# Altium PCB 电眼主板.PcbDoc (part 2 of 5)
Units mm, origin at the board's own origin, x right, y up, seen from the top; angles counter-clockwise.
Board outline 180 x 100 mm, 2 copper layers (Top Layer, Bottom Layer); 210 components, 262 nets, 810 pads, 212 vias.
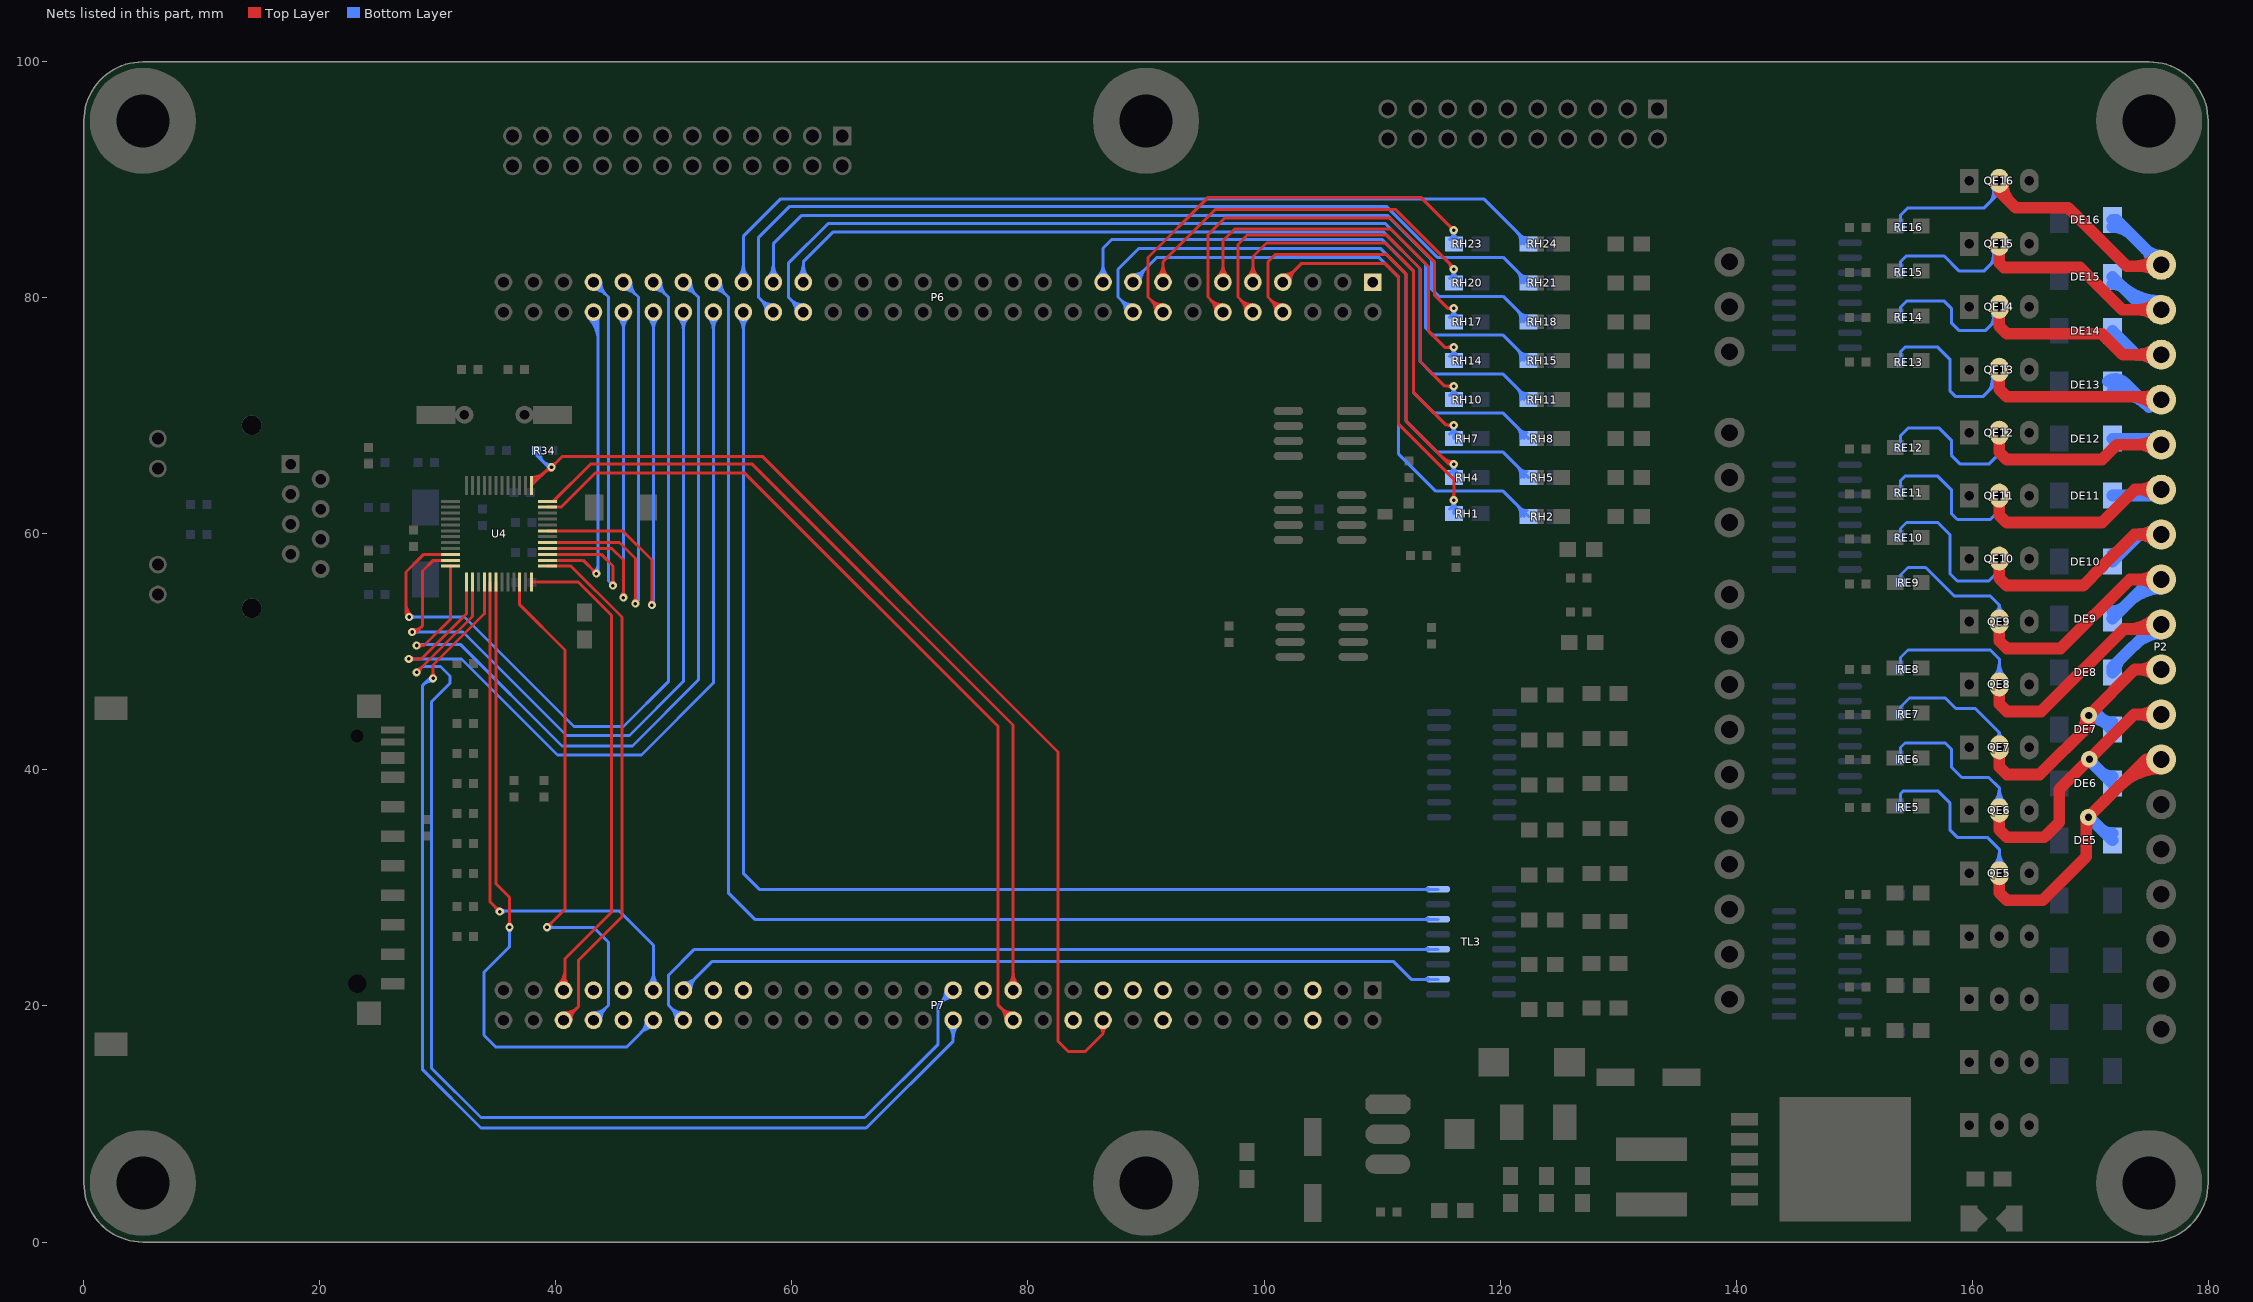
[diagram p2: the nets of this part, all layers, seen from the top]

## Via types
v1: diameter 0.7, hole 0.3, Top Layer to Bottom Layer, 163 vias
v2: diameter 1.4, hole 0.6, Top Layer to Bottom Layer, 49 vias

## Nets (pads, with @x,y where several pads share a name; then routed paths per layer and width w, separated by ;. In a path a pad name is that pad's centre, name@x,y a point inside that pad or via, vN(x,y) a via of type N, cw(c..) or ccw(c..) an arc to the next point about the centre after c; other vN are vias at no path point) (continued)
EXT_OUT_CH4: DE5.2 P2.12 QE5.2 RE5.1 | length 53.4
  Top Layer w1: QE5.2@162.306,31.242 162.306,29.591 162.941,28.956 165.989,28.956 169.672,32.639 169.672,35.814 174.752,40.894 P2.12@176.022,40.894 ; 169.672,35.075 cw(c170.772,35.075) v2@169.994,35.853 ; 172.54,38.682 cw(c176.022,35.199) P2.12@176.022,40.124 ; 174.247,40.389 cw(c176.022,38.613) P2.12@176.022,41.124
  Bottom Layer w0.254: RE5.1@153.744,37.01 ccw(c153.311,37.443) 153.924,37.443 ccw(c154.537,37.443) RE5.1@154.104,37.01 ; RE5.1@153.924,36.83 153.924,37.973 154.178,38.227 157.099,38.227 158.115,37.211 158.115,34.925 158.75,34.29 161.29,34.29 162.306,33.274 QE5.2@162.306,31.242 ; QE5.2@161.839,31.938 ccw(c160.712,33.065) 162.306,33.065 ccw(c163.9,33.065) QE5.2@162.773,31.938 ; QE5.2@162.019,31.758 ccw(c161.325,32.452) 162.306,32.452 ccw(c163.287,32.452) QE5.2@162.593,31.758
  Bottom Layer w1: v2(169.853,35.995) 169.853,36.014 169.799,36.068 169.854,36.068 DE5.2@171.886,34.036 ; 170.862,35.06 ccw(c171.886,36.085) DE5.2@171.886,34.636
EXT_OUT_CH5: DE6.2 P2.11 QE6.2 RE6.1 | length 47.4
  Top Layer w1: QE6.2@162.306,36.576 162.306,34.925 162.941,34.29 166.116,34.29 167.386,35.56 167.386,38.354 172.148,43.116 173.736,44.704 P2.11@176.022,44.704 ; P2.11@175.478,44.16 ccw(c174.163,42.845) 174.163,44.704 ccw(c174.163,46.563) P2.11@175.478,45.248
  Bottom Layer w0.254: RE6.1@153.744,41.074 ccw(c153.311,41.507) 153.924,41.507 ccw(c154.537,41.507) RE6.1@154.104,41.074 ; RE6.1@153.924,40.894 153.924,41.91 154.305,42.291 157.734,42.291 158.242,41.783 158.242,40.259 159.131,39.37 161.417,39.37 162.306,38.481 QE6.2@162.306,36.576 ; QE6.2@161.839,37.272 ccw(c160.712,38.399) 162.306,38.399 ccw(c163.9,38.399) QE6.2@162.773,37.272 ; QE6.2@162.019,37.092 ccw(c161.325,37.786) 162.306,37.786 ccw(c163.287,37.786) QE6.2@162.593,37.092
  Bottom Layer w1: v2(169.936,40.904) 169.936,40.812 DE6.2@171.886,38.862 ; 170.862,39.886 ccw(c171.886,40.911) DE6.2@171.886,39.462
EXT_OUT_CH6: DE7.2 P2.10 QE7.2 RE7.1 | length 47.6
  Top Layer w1: QE7.2@162.306,41.91 162.306,40.259 162.941,39.624 165.735,39.624 169.907,43.796 v2@169.907,44.639 ; 168.946,42.835 ccw(c167.166,44.616) v2@169.684,44.616 ; v2(169.884,44.616) v2@169.907,44.639 ; P2.10@175.478,47.97 ccw(c174.163,46.655) 174.163,48.514 ccw(c174.163,50.373) P2.10@175.478,49.058 ; P2.10@176.022,48.514 173.782,48.514 v2@169.907,44.639
  Bottom Layer w0.254: RE7.1@153.744,44.884 ccw(c153.311,45.317) 153.924,45.317 ccw(c154.537,45.317) RE7.1@154.104,44.884 ; RE7.1@153.924,44.704 153.924,45.339 154.686,46.101 157.734,46.101 158.623,45.212 160.274,45.212 162.306,43.18 ; QE7.2@162.024,42.736 ccw(c161.815,43.18) 162.306,43.18 ; QE7.2@162.306,41.91 162.306,43.18 ; QE7.2@162.588,42.736 cw(c162.797,43.18) 162.306,43.18
  Bottom Layer w1: v2@169.884,44.416 cw(c169.884,41.951) DE7.2@171.626,43.694 ; v2@169.961,44.431 cw(c170.37,43.46) DE7.2@171.115,44.205 ; 170.862,44.458 ccw(c171.886,45.483) DE7.2@171.886,44.034 ; DE7.2@171.623,43.589 ccw(c169.884,42.628) v2(169.884,44.616) 170.704,44.616 DE7.2@171.886,43.434
EXT_OUT_CH7: DE8.2 P2.9 QE8.2 RE8.1 | length 47.6
  Top Layer w1: QE8.2@162.306,47.244 162.306,45.593 162.941,44.958 165.862,44.958 172.847,51.943 175.641,51.943 P2.9@176.022,52.324 ; 173.243,51.943 ccw(c173.243,55.103) P2.9@175.478,52.868
  Bottom Layer w0.254: RE8.1@153.744,48.694 ccw(c153.311,49.127) 153.924,49.127 ccw(c154.537,49.127) RE8.1@154.104,48.694 ; RE8.1@153.924,48.514 153.924,49.53 154.559,50.165 161.544,50.165 162.306,49.403 QE8.2@162.306,47.244 ; QE8.2@161.839,47.94 ccw(c160.712,49.067) 162.306,49.067 ccw(c163.9,49.067) QE8.2@162.773,47.94 ; QE8.2@162.019,47.76 ccw(c161.325,48.454) 162.306,48.454 ccw(c163.287,48.454) QE8.2@162.593,47.76
  Bottom Layer w1: DE8.2@171.886,48.26 171.886,48.696 175.514,52.324 P2.9@176.022,52.324 ; DE8.2@172.186,48.56 cw(c173.239,48.56) DE8.2@172.494,49.304 ; 173.84,50.65 cw(c176.022,48.469) P2.9@176.022,51.554
EXT_OUT_CH8: DE9.2 P2.8 QE9.2 RE9.1 | length 45.1
  Top Layer w1: QE9.2@162.306,52.578 162.306,50.927 162.941,50.292 167.513,50.292 173.355,56.134 P2.8@176.022,56.134 ; P2.8@175.478,55.59 ccw(c174.163,54.275) 174.163,56.134 ccw(c174.163,57.993) P2.8@175.478,56.678
  Bottom Layer w0.254: RE9.1@153.744,56.06 ccw(c153.311,56.493) 153.924,56.493 ccw(c154.537,56.493) RE9.1@154.104,56.06 ; RE9.1@153.924,55.88 153.924,56.515 154.559,57.15 156.068,57.15 158.481,54.737 161.544,54.737 162.306,53.975 ; QE9.2@161.965,53.372 ccw(c161.603,53.975) 162.306,53.975 ; QE9.2@162.306,52.578 162.306,53.975 ; QE9.2@162.647,53.372 cw(c163.009,53.975) 162.306,53.975
  Bottom Layer w1: DE9.2@171.886,52.832 175.188,56.134 P2.8@176.022,56.134 ; DE9.2@171.886,53.432 ccw(c171.886,54.881) 172.91,53.856 ; 173.284,54.23 cw(c176.022,51.492) P2.8@176.022,55.364
EXT_OUT_CH9: DE10.2 P2.7 QE10.2 RE10.1 | length 47.9
  Top Layer w1: QE10.2@162.306,57.912 162.306,56.261 162.941,55.626 169.418,55.626 170.998,57.206 173.736,59.944 P2.7@176.022,59.944 ; P2.7@175.478,59.4 ccw(c174.163,58.085) 174.163,59.944 ccw(c174.163,61.803) P2.7@175.478,60.488
  Bottom Layer w0.254: RE10.1@153.744,59.87 ccw(c153.311,60.303) 153.924,60.303 ccw(c154.537,60.303) RE10.1@154.104,59.87 ; RE10.1@153.924,59.69 153.924,60.452 154.432,60.96 157.099,60.96 158.115,59.944 158.115,56.642 158.75,56.007 161.417,56.007 162.306,56.896 QE10.2@162.306,57.912 ; 161.811,56.401 ccw(c161.388,56.823) QE10.2@161.824,57.232 ; 161.996,56.586 ccw(c161.58,57.003) QE10.2@162.009,57.405 ; 162.182,56.772 ccw(c161.771,57.182) QE10.2@162.195,57.579
  Bottom Layer w1: DE10.2@171.886,57.658 174.172,59.944 ; DE10.2@171.886,58.258 ccw(c171.886,59.707) 172.91,58.682 ; P2.7@175.476,59.401 ccw(c174.172,58.107) 174.172,59.944 ; P2.7@175.476,60.487 cw(c174.172,61.781) 174.172,59.944 ; P2.7@176.022,59.944 174.172,59.944
EXT_OUT_CH10: DE11.2 P2.6 QE11.2 RE11.1 | length 42.8
  Top Layer w1: QE11.2@162.306,63.246 162.306,61.595 162.941,60.96 170.998,60.96 173.792,63.754 P2.6@176.022,63.754 ; P2.6@175.478,63.21 ccw(c174.163,61.895) 174.163,63.754 ccw(c174.163,65.613) P2.6@175.478,64.298
  Bottom Layer w0.254: RE11.1@153.744,63.68 ccw(c153.311,64.113) 153.924,64.113 ccw(c154.537,64.113) RE11.1@154.104,63.68 ; RE11.1@153.924,63.5 153.924,64.516 154.305,64.897 157.099,64.897 158.242,63.754 158.242,61.722 158.75,61.214 161.544,61.214 162.306,61.976 ; QE11.2@162.024,62.42 cw(c161.815,61.976) 162.306,61.976 ; QE11.2@162.306,63.246 162.306,61.976 ; QE11.2@162.588,62.42 ccw(c162.797,61.976) 162.306,61.976
  Bottom Layer w1: DE11.2@171.886,63.246 175.514,63.246 P2.6@176.022,63.754 ; 172.937,63.246 ccw(c172.937,66.839) P2.6@175.478,64.298
EXT_OUT_CH11: DE12.2 P2.5 QE12.2 RE12.1 | length 44.9
  Top Layer w1: QE12.2@162.306,68.58 162.306,66.929 162.941,66.294 170.998,66.294 172.268,67.564 P2.5@176.022,67.564 ; P2.5@175.478,67.02 ccw(c174.163,65.705) 174.163,67.564 ccw(c174.163,69.423) P2.5@175.478,68.108
  Bottom Layer w0.254: RE12.1@153.744,67.49 ccw(c153.311,67.923) 153.924,67.923 ccw(c154.537,67.923) RE12.1@154.104,67.49 ; RE12.1@153.924,67.31 153.924,68.326 154.559,68.961 157.226,68.961 158.242,67.945 158.242,66.675 159.004,65.913 161.417,65.913 162.306,66.802 ; QE12.2@161.849,67.875 cw(c160.819,66.802) 162.306,66.802 ; QE12.2@162.025,68.058 cw(c161.391,67.398) 162.306,67.398 cw(c163.221,67.398) QE12.2@162.587,68.058 ; QE12.2@162.306,68.58 162.306,66.802 ; QE12.2@162.763,67.875 ccw(c163.793,66.802) 162.306,66.802
  Bottom Layer w1: DE12.2@171.886,68.072 175.514,68.072 P2.5@176.022,67.564 ; 172.937,68.072 cw(c172.937,64.479) P2.5@175.478,67.02
EXT_OUT_CH12: DE13.2 P2.4 QE13.2 RE13.1 | length 54.4
  Top Layer w1: QE13.2@162.306,73.914 162.306,72.263 162.941,71.628 175.768,71.628 P2.4@176.022,71.374 ; 173.55,71.628 cw(c173.55,68.902) P2.4@175.478,70.83 ; 174.776,71.628 ccw(c174.776,72.62) P2.4@175.478,71.918
  Bottom Layer w0.254: RE13.1@153.77,74.729 ccw(c153.336,75.162) 153.949,75.162 ccw(c154.562,75.162) RE13.1@154.129,74.729 ; RE13.1@153.949,74.549 153.949,75.463 154.305,75.819 157.099,75.819 158.115,74.803 158.115,72.136 158.623,71.628 160.909,71.628 162.306,73.025 QE13.2@162.306,73.914 ; 161.239,71.958 ccw(c160.084,73.114) QE13.2@161.666,73.521 ; 161.554,72.273 ccw(c160.584,73.243) QE13.2@161.912,73.584 ; 161.869,72.588 ccw(c161.085,73.371) QE13.2@162.158,73.647 ; 162.183,72.902 ccw(c161.586,73.5) QE13.2@162.404,73.711
  Bottom Layer w1: DE13.2@171.513,72.936 cw(c172.14,71.94) 172.972,72.773 ; DE13.2@171.886,72.044 cw(c171.886,67.662) P2.4@174.984,70.761 ; DE13.2@171.886,72.644 173.101,72.644 174.498,71.247 ; DE13.2@171.886,73.044 cw(c171.886,71.076) 173.277,72.468 ; DE13.2@172.046,72.09 cw(c172.825,70.853) 173.858,71.887 ; P2.4@175.349,71.748 cw(c174.498,72.22) 174.498,71.247 ; P2.4@175.47,70.837 ccw(c174.498,69.89) 174.498,71.247 ; P2.4@176.022,71.374 175.895,71.247 174.498,71.247
EXT_OUT_CH13: DE14.2 P2.3 QE14.2 RE14.1 | length 45.2
  Top Layer w1: QE14.2@162.306,79.248 162.306,77.597 162.941,76.962 170.998,76.962 172.776,75.184 P2.3@176.022,75.184 ; P2.3@175.478,74.64 ccw(c174.163,73.325) 174.163,75.184 ccw(c174.163,77.043) P2.3@175.478,75.728
  Bottom Layer w0.254: RE14.1@153.77,78.539 ccw(c153.336,78.972) 153.949,78.972 ccw(c154.562,78.972) RE14.1@154.129,78.539 ; RE14.1@153.949,78.359 153.949,79.223 154.482,79.756 157.607,79.756 158.242,79.121 158.242,77.883 158.877,77.248 161.163,77.248 162.306,78.391 QE14.2@162.306,79.248 ; 161.477,77.562 ccw(c160.718,78.322) QE14.2@161.701,78.754 ; 161.74,77.825 ccw(c161.083,78.482) QE14.2@161.934,78.856 ; 162.003,78.088 ccw(c161.448,78.643) QE14.2@162.166,78.958
  Bottom Layer w1: DE14.2@171.886,76.616 cw(c171.886,75.167) 172.91,76.192 ; DE14.2@171.886,77.216 173.918,75.184 P2.3@176.022,75.184 ; P2.3@175.478,74.64 ccw(c174.163,73.325) 174.163,75.184 ccw(c174.163,77.043) P2.3@175.478,75.728
EXT_OUT_CH14: DE15.2 P2.2 QE15.2 RE15.1 | length 49.7
  Top Layer w1: QE15.2@162.306,84.582 162.306,82.963 162.687,82.582 169.132,82.582 172.72,78.994 P2.2@176.022,78.994 ; P2.2@175.478,78.45 ccw(c174.163,77.135) 174.163,78.994 ccw(c174.163,80.853) P2.2@175.478,79.538
  Bottom Layer w0.254: RE15.1@153.77,82.349 ccw(c153.336,82.782) 153.949,82.782 ccw(c154.562,82.782) RE15.1@154.129,82.349 ; RE15.1@153.949,82.169 153.949,83.083 154.409,83.543 157.63,83.543 158.877,82.296 161.036,82.296 162.306,83.566 QE15.2@162.306,84.582 ; 161.43,82.69 ccw(c160.529,83.59) QE15.2@161.699,84.093 ; 161.695,82.955 ccw(c160.9,83.749) QE15.2@161.933,84.193 ; 161.96,83.22 ccw(c161.271,83.909) QE15.2@162.166,84.293 ; 162.225,83.485 ccw(c161.642,84.068) QE15.2@162.399,84.394
  Bottom Layer w1: DE15.2@171.886,81.188 cw(c171.886,79.739) 172.91,80.764 ; DE15.2@171.886,81.788 174.68,78.994 P2.2@176.022,78.994 ; DE15.2@172.557,81.117 ccw(c175.831,84.391) P2.2@175.995,79.764 ; 174.182,79.492 ccw(c175.942,81.251) P2.2@176.03,78.764
EXT_OUT_CH15: DE16.2 P2.1 QE16.2 RE16.1 | length 49.5
  Top Layer w1: QE16.2@162.306,89.916 162.306,89.027 163.703,87.63 168.148,87.63 173.101,82.677 175.895,82.677 P2.1@176.022,82.804 ; QE16.2@162.593,89.687 ccw(c164.882,89.687) 163.264,88.069 ; 173.856,82.677 ccw(c173.856,84.97) P2.1@175.478,83.348 ; 174.47,82.677 cw(c174.47,81.252) P2.1@175.478,82.26
  Bottom Layer w0.254: RE16.1@153.77,86.159 ccw(c153.336,86.592) 153.949,86.592 ccw(c154.562,86.592) RE16.1@154.129,86.159 ; RE16.1@153.949,85.979 153.949,87.02 154.559,87.63 161.036,87.63 162.306,88.9 QE16.2@162.306,89.916 ; 161.43,88.024 ccw(c160.529,88.924) QE16.2@161.699,89.427 ; 161.695,88.289 ccw(c160.9,89.083) QE16.2@161.933,89.527 ; 161.96,88.554 ccw(c161.271,89.243) QE16.2@162.166,89.627 ; 162.225,88.819 ccw(c161.642,89.402) QE16.2@162.399,89.728
  Bottom Layer w1: DE16.2@171.886,86.014 cw(c171.886,83.778) 173.467,85.359 ; DE16.2@171.886,86.614 172.212,86.614 P2.1@176.022,82.804 ; P2.1@175.252,82.804 ccw(c173.393,82.804) 174.708,84.118 ccw(c176.022,85.433) P2.1@176.022,83.574
FSMC_A0: P6.7 RH1.2 | length 40.1
  Top Layer w0.254: P6.7@101.6,81.336 103.195,82.931 110.236,82.931 111.379,81.788 111.379,69.341 116.078,64.642 v1(116.078,62.863) ; P6.7@101.6,81.705 ccw(c101.6,82.596) 102.23,81.966 ccw(c102.86,81.336) P6.7@101.969,81.336 ; P6.7@101.6,81.959 ccw(c101.6,83.463) 102.664,82.4 ccw(c103.727,81.336) P6.7@102.223,81.336 ; v1@115.92,63.021 ccw(c115.54,63.402) 116.078,63.402 ccw(c116.616,63.402) v1@116.236,63.021
  Bottom Layer w0.254: RH1.2@115.738,62.097 ccw(c115.046,62.863) v1(116.078,62.863) ; v1@115.92,62.706 cw(c115.54,62.325) 116.078,62.325 cw(c116.616,62.325) v1@116.236,62.706 ; RH1.2@116.078,61.72 v1(116.078,62.863) ; RH1.2@116.418,62.097 cw(c117.11,62.863) v1(116.078,62.863)
FSMC_A1: P6.8 RH4.2 | length 44.7
  Top Layer w0.254: P6.8@100.977,78.796 ccw(c99.473,78.796) 100.536,79.86 ccw(c101.6,80.923) P6.8@101.6,79.419 ; P6.8@101.231,78.796 ccw(c100.34,78.796) 100.97,79.426 ccw(c101.6,80.056) P6.8@101.6,79.165 ; P6.8@101.6,78.796 100.33,80.066 100.33,83.058 100.965,83.693 110.363,83.693 112.014,82.042 112.014,69.596 115.699,65.911 v1(116.078,65.911) ; 115.05,66.56 ccw(c116.078,67.589) v1@116.078,66.134 ; 115.483,66.127 ccw(c116.078,66.721) v1@116.078,65.88
  Bottom Layer w0.254: RH4.2@115.738,65.145 ccw(c115.046,65.911) v1(116.078,65.911) ; v1@115.92,65.754 cw(c115.54,65.373) 116.078,65.373 cw(c116.616,65.373) v1@116.236,65.754 ; RH4.2@116.078,64.768 v1(116.078,65.911) ; RH4.2@116.418,65.145 cw(c117.11,65.911) v1(116.078,65.911)
FSMC_A2: P6.9 RH7.2 | length 40.4
  Top Layer w0.254: P6.9@98.619,81.777 ccw(c97.556,82.84) 99.06,82.84 ccw(c100.564,82.84) P6.9@99.501,81.777 ; P6.9@98.799,81.597 ccw(c98.169,82.227) 99.06,82.227 ccw(c99.951,82.227) P6.9@99.321,81.597 ; P6.9@99.06,81.336 99.06,83.512 100.203,84.655 110.29,84.655 112.649,82.296 112.649,72.009 115.445,69.213 v1(116.078,69.213) ; v1@115.92,69.056 ccw(c115.54,68.675) 115.54,69.213 ccw(c115.54,69.752) v1@115.92,69.371
  Bottom Layer w0.254: RH7.2@115.738,68.447 ccw(c115.046,69.213) v1(116.078,69.213) ; v1@115.92,69.056 cw(c115.54,68.675) 116.078,68.675 cw(c116.616,68.675) v1@116.236,69.056 ; RH7.2@116.078,68.07 v1(116.078,69.213) ; RH7.2@116.418,68.447 cw(c117.11,69.213) v1(116.078,69.213)
FSMC_A3: P6.10 RH10.2 | length 43.1
  Top Layer w0.254: P6.10@98.437,78.796 ccw(c96.933,78.796) 97.996,79.86 ccw(c99.06,80.923) P6.10@99.06,79.419 ; P6.10@98.691,78.796 ccw(c97.8,78.796) 98.43,79.426 ccw(c99.06,80.056) P6.10@99.06,79.165 ; P6.10@99.06,78.796 97.79,80.066 97.79,84.528 98.606,85.344 110.363,85.344 113.259,82.448 113.259,74.574 115.318,72.515 v1(116.078,72.515) ; v1@115.92,72.358 ccw(c115.54,71.977) 115.54,72.515 ccw(c115.54,73.054) v1@115.92,72.673
  Bottom Layer w0.254: RH10.2@115.738,71.749 ccw(c115.046,72.515) v1(116.078,72.515) ; v1@115.92,72.358 cw(c115.54,71.977) 116.078,71.977 cw(c116.616,71.977) v1@116.236,72.358 ; RH10.2@116.078,71.372 v1(116.078,72.515) ; RH10.2@116.418,71.749 cw(c117.11,72.515) v1(116.078,72.515)
FSMC_A4: P6.11 RH14.2 | length 39.1
  Top Layer w0.254: P6.11@96.079,81.777 ccw(c95.016,82.84) 96.52,82.84 ccw(c98.024,82.84) P6.11@96.961,81.777 ; P6.11@96.259,81.597 ccw(c95.629,82.227) 96.52,82.227 ccw(c97.411,82.227) P6.11@96.781,81.597 ; P6.11@96.52,81.336 96.52,84.836 97.536,85.852 110.725,85.852 113.919,82.658 113.919,77.216 115.318,75.817 v1(116.078,75.817) ; v1@115.92,75.66 ccw(c115.54,75.279) 115.54,75.817 ccw(c115.54,76.356) v1@115.92,75.975
  Bottom Layer w0.254: RH14.2@115.738,75.051 ccw(c115.046,75.817) v1(116.078,75.817) ; v1@115.92,75.66 cw(c115.54,75.279) 116.078,75.279 cw(c116.616,75.279) v1@116.236,75.66 ; RH14.2@116.078,74.674 v1(116.078,75.817) ; RH14.2@116.418,75.051 cw(c117.11,75.817) v1(116.078,75.817)
FSMC_A5: P6.12 RH17.2 | length 41.5
  Top Layer w0.254: P6.12@95.897,78.796 ccw(c94.393,78.796) 95.456,79.86 ccw(c96.52,80.923) P6.12@96.52,79.419 ; P6.12@96.151,78.796 ccw(c95.26,78.796) 95.89,79.426 ccw(c96.52,80.056) P6.12@96.52,79.165 ; P6.12@96.52,78.796 95.25,80.066 95.25,85.344 96.666,86.76 110.725,86.76 114.427,83.058 114.427,80.264 115.572,79.119 ; v1@115.913,78.969 ccw(c115.572,78.656) 115.572,79.119 ; v1@115.913,79.27 cw(c115.572,79.583) 115.572,79.119 ; v1(116.078,79.119) 115.572,79.119
  Bottom Layer w0.254: RH17.2@115.738,78.353 ccw(c115.046,79.119) v1(116.078,79.119) ; v1@115.92,78.962 cw(c115.54,78.581) 116.078,78.581 cw(c116.616,78.581) v1@116.236,78.962 ; RH17.2@116.078,77.976 v1(116.078,79.119) ; RH17.2@116.418,78.353 cw(c117.11,79.119) v1(116.078,79.119)
FSMC_A6: P6.40 RH15.2 | length 83.2
  Bottom Layer w0.254: P6.40@60.337,78.796 ccw(c58.833,78.796) 59.896,79.86 ccw(c60.96,80.923) P6.40@60.96,79.419 ; P6.40@60.591,78.796 ccw(c59.7,78.796) 60.33,79.426 ccw(c60.96,80.056) P6.40@60.96,79.165 ; P6.40@60.96,78.796 59.69,80.066 59.69,82.931 63.065,86.306 110.276,86.306 113.69,82.891 113.69,77.445 114.3,76.835 120.267,76.835 RH15.2@122.428,74.674 ; 121.344,75.758 cw(c120.26,74.674) RH15.2@121.793,74.674 ; 121.651,75.452 ccw(c122.301,76.102) RH15.2@122.301,75.182 ; 121.778,75.325 cw(c121.127,74.674) RH15.2@122.047,74.674
FSMC_A7: P6.41 RH18.2 | length 79.9
  Bottom Layer w0.254: P6.41@57.979,81.777 ccw(c56.916,82.84) 58.42,82.84 ccw(c59.924,82.84) P6.41@58.861,81.777 ; P6.41@58.159,81.597 ccw(c57.529,82.227) 58.42,82.227 ccw(c59.311,82.227) P6.41@58.681,81.597 ; P6.41@58.42,81.336 58.42,84.582 60.833,86.995 110.443,86.995 114.173,83.265 114.173,80.772 114.808,80.137 120.267,80.137 RH18.2@122.428,77.976 ; 121.344,79.06 cw(c120.26,77.976) RH18.2@121.793,77.976 ; 121.651,78.754 ccw(c122.301,79.404) RH18.2@122.301,78.484 ; 121.778,78.627 cw(c121.127,77.976) RH18.2@122.047,77.976
FSMC_A8: P6.42 RH21.2 | length 82.3
  Bottom Layer w0.254: P6.42@57.797,78.796 ccw(c56.293,78.796) 57.356,79.86 ccw(c58.42,80.923) P6.42@58.42,79.419 ; P6.42@58.051,78.796 ccw(c57.16,78.796) 57.79,79.426 ccw(c58.42,80.056) P6.42@58.42,79.165 ; P6.42@58.42,78.796 57.15,80.066 57.15,85.09 59.817,87.757 110.363,87.757 114.681,83.439 120.267,83.439 RH21.2@122.428,81.278 ; 121.344,82.362 cw(c120.26,81.278) RH21.2@121.793,81.278 ; 121.651,82.056 ccw(c122.301,82.706) RH21.2@122.301,81.786 ; 121.778,81.929 cw(c121.127,81.278) RH21.2@122.047,81.278
FSMC_A9: P6.43 RH24.2 | length 79.7
  Bottom Layer w0.254: P6.43@55.439,81.777 ccw(c54.376,82.84) 55.88,82.84 ccw(c57.384,82.84) P6.43@56.321,81.777 ; P6.43@55.619,81.597 ccw(c54.989,82.227) 55.88,82.227 ccw(c56.771,82.227) P6.43@56.141,81.597 ; P6.43@55.88,81.336 55.88,85.217 59.055,88.392 118.616,88.392 RH24.2@122.428,84.58 ; 121.344,85.664 cw(c120.26,84.58) RH24.2@121.793,84.58 ; 121.651,85.358 ccw(c122.301,86.008) RH24.2@122.301,85.088 ; 121.778,85.231 cw(c121.127,84.58) RH24.2@122.047,84.58
FSMC_A10: P6.44 TL3.16 | length 111.3
  Bottom Layer w0.254: P6.44@55.439,78.355 cw(c54.376,77.292) 55.88,77.292 cw(c57.384,77.292) P6.44@56.321,78.355 ; P6.44@55.619,78.535 cw(c54.989,77.905) 55.88,77.905 cw(c56.771,77.905) P6.44@56.141,78.535 ; P6.44@55.88,78.796 55.88,31.242 57.237,29.885 TL3.16@114.749,29.885 ; TL3.16@113.905,29.777 ccw(c113.644,29.517) 113.644,29.885 ccw(c113.644,30.253) TL3.16@113.905,29.993
FSMC_A11: P6.45 TL3.14 | length 117.7
  Bottom Layer w0.254: P6.45@53.34,80.713 cw(c53.34,79.209) 54.404,80.272 cw(c55.467,81.336) P6.45@53.963,81.336 ; P6.45@53.34,80.967 cw(c53.34,80.076) 53.97,80.706 cw(c54.6,81.336) P6.45@53.709,81.336 ; P6.45@53.34,81.336 54.61,80.066 54.61,29.591 56.856,27.345 TL3.14@114.749,27.345 ; TL3.14@113.905,27.237 ccw(c113.644,26.977) 113.644,27.345 ccw(c113.644,27.713) TL3.14@113.905,27.453
FSMC_A12: P7.48 TL3.12 | length 74.8
  Bottom Layer w0.254: P7.48@50.177,18.796 ccw(c48.673,18.796) 49.736,19.86 ccw(c50.8,20.923) P7.48@50.8,19.419 ; P7.48@50.431,18.796 ccw(c49.54,18.796) 50.17,19.426 ccw(c50.8,20.056) P7.48@50.8,19.165 ; P7.48@50.8,18.796 49.53,20.066 49.53,22.606 51.729,24.805 TL3.12@114.749,24.805 ; TL3.12@113.905,24.697 ccw(c113.644,24.437) 113.644,24.805 ccw(c113.644,25.173) TL3.12@113.905,24.913
FSMC_A13: P7.47 TL3.10 | length 69.9
  Bottom Layer w0.254: P7.47@50.8,21.336 53.213,23.749 110.998,23.749 112.482,22.265 TL3.10@114.749,22.265 ; P7.47@50.8,21.705 ccw(c50.8,22.596) 51.43,21.966 ccw(c52.06,21.336) P7.47@51.169,21.336 ; P7.47@50.8,21.959 ccw(c50.8,23.463) 51.864,22.4 ccw(c52.927,21.336) P7.47@51.423,21.336 ; TL3.10@113.905,22.157 ccw(c113.644,21.897) 113.644,22.265 ccw(c113.644,22.633) TL3.10@113.905,22.373
FSMC_A14: P7.46
FSMC_A15: P7.45
FSMC_A16: P7.53
FSMC_A17: P7.52
FSMC_A18: P7.51
FSMC_A23: P6.1
FSMC_A24: P7.16
FSMC_A25: P7.15
FSMC_CD: P6.18 RH5.2 | length 61.4
  Bottom Layer w0.254: P6.18@88.277,78.796 ccw(c86.773,78.796) 87.836,79.86 ccw(c88.9,80.923) P6.18@88.9,79.419 ; P6.18@88.531,78.796 ccw(c87.64,78.796) 88.27,79.426 ccw(c88.9,80.056) P6.18@88.9,79.165 ; P6.18@88.9,78.796 87.63,80.066 87.63,82.423 89.408,84.201 109.855,84.201 112.014,82.042 112.014,69.596 114.681,66.929 120.266,66.929 RH5.2@122.428,64.767 ; 121.344,65.851 cw(c120.26,64.767) RH5.2@121.793,64.767 ; 121.651,65.544 ccw(c122.301,66.195) RH5.2@122.301,65.275 ; 121.778,65.417 cw(c121.127,64.767) RH5.2@122.047,64.767
FSMC_CLK: P7.27
FSMC_D0: P7.50 U4.18 | length 60.9
  Top Layer w0.254: U4.18@34.933,55.918 34.933,51.57 34.925,51.562 34.925,30.353 35.052,30.226 36.068,29.21 v1(36.068,26.67) ; v1@35.91,26.828 ccw(c35.53,27.208) 36.068,27.208 ccw(c36.606,27.208) v1@36.226,26.828
  Bottom Layer w0.254: v1@35.91,26.512 cw(c35.53,26.132) 36.068,26.132 cw(c36.606,26.132) v1@36.226,26.512 ; v1(36.068,26.67) 36.068,25.019 33.909,22.86 33.909,17.526 34.925,16.51 45.974,16.51 P7.50@48.26,18.796 ; P7.50@47.637,18.796 cw(c46.133,18.796) 47.196,17.732 cw(c48.26,16.669) P7.50@48.26,18.173 ; P7.50@47.891,18.796 cw(c47,18.796) 47.63,18.166 cw(c48.26,17.536) P7.50@48.26,18.427
FSMC_D1: P7.49 U4.17 | length 51.8
  Top Layer w0.254: U4.17@34.433,55.918 34.433,28.813 v1(35.244,28.002) ; v1@35.021,28.002 ccw(c34.483,28.002) 34.863,28.383 ccw(c35.244,28.763) v1@35.244,28.225
  Bottom Layer w0.254: v1(35.244,28.002) 35.309,28.067 45.339,28.067 48.26,25.146 P7.49@48.26,21.336 ; v1@35.402,27.844 cw(c35.939,27.307) 35.939,28.067 ; v1@35.402,28.16 ccw(c35.626,28.384) 35.626,28.067 ; P7.49@47.819,21.777 ccw(c46.756,22.84) 48.26,22.84 ccw(c49.764,22.84) P7.49@48.701,21.777 ; P7.49@47.999,21.597 ccw(c47.369,22.227) 48.26,22.227 ccw(c49.151,22.227) P7.49@48.521,21.597
FSMC_D2: P7.30 U4.16 | length 101.7
  Top Layer w0.254: v1@29.433,47.91 ccw(c29.053,48.29) 29.591,48.29 ccw(c30.129,48.29) v1@29.749,47.91 ; v1(29.591,47.752) 29.591,48.895 33.909,53.213 33.933,53.213 U4.16@33.933,55.918
  Bottom Layer w0.254: 28.703,47.161 cw(c29.591,46.274) v1@29.591,47.529 ; 29.137,47.595 cw(c29.591,47.141) v1@29.591,47.783 ; v1(29.591,47.752) 29.464,47.879 29.421,47.879 28.714,47.172 28.714,14.593 33.655,9.652 66.294,9.652 73.66,17.018 P7.30@73.66,18.796 ; P7.30@73.219,18.355 cw(c72.156,17.292) 73.66,17.292 cw(c75.164,17.292) P7.30@74.101,18.355 ; P7.30@73.399,18.535 cw(c72.769,17.905) 73.66,17.905 cw(c74.551,17.905) P7.30@73.921,18.535
FSMC_D3: P7.29 U4.14 | length 104.7
  Top Layer w0.254: v1(28.194,48.26) 32.933,52.999 U4.14@32.933,55.918 ; v1@28.194,48.483 ccw(c28.194,49.021) 28.575,48.641 ccw(c28.955,48.26) v1@28.417,48.26
  Bottom Layer w0.254: v1(28.194,48.26) 28.702,48.768 30.226,48.768 31.031,47.963 31.031,47.346 29.464,45.779 29.464,14.732 33.655,10.541 66.167,10.541 72.39,16.764 72.39,20.066 P7.29@73.66,21.336 ; v1@28.194,48.483 ccw(c28.194,49.021) 28.575,48.641 ccw(c28.955,48.26) v1@28.417,48.26 ; P7.29@73.037,21.336 cw(c71.533,21.336) 72.596,20.272 cw(c73.66,19.209) P7.29@73.66,20.713 ; P7.29@73.291,21.336 cw(c72.4,21.336) 73.03,20.706 cw(c73.66,20.076) P7.29@73.66,20.967
FSMC_D4: P6.46 U4.13 | length 77.7
  Top Layer w0.254: v1(27.536,49.41) 28.582,49.41 32.433,53.261 U4.13@32.433,55.918 ; v1@27.694,49.252 cw(c28.074,48.871) 28.074,49.41 cw(c28.074,49.948) v1@27.694,49.567
  Bottom Layer w0.254: v1(27.536,49.41) 31.997,49.41 40.132,41.275 47.244,41.275 53.34,47.371 P6.46@53.34,78.796 ; v1@27.694,49.252 cw(c28.074,48.871) 28.074,49.41 cw(c28.074,49.948) v1@27.694,49.567 ; P6.46@52.899,78.355 cw(c51.836,77.292) 53.34,77.292 cw(c54.844,77.292) P6.46@53.781,78.355 ; P6.46@53.079,78.535 cw(c52.449,77.905) 53.34,77.905 cw(c54.231,77.905) P6.46@53.601,78.535
FSMC_D5: P6.47 U4.12 | length 77.6
  Top Layer w0.254: v1(28.194,50.546) 28.829,50.546 31.083,52.8 U4.12@31.083,57.268 ; v1@28.352,50.388 cw(c28.732,50.008) 28.732,50.546 cw(c28.732,51.084) v1@28.352,50.704
  Bottom Layer w0.254: v1(28.194,50.546) 28.298,50.65 31.9,50.65 40.513,42.037 46.482,42.037 52.07,47.625 52.07,80.066 P6.47@50.8,81.336 ; v1@28.352,50.388 cw(c28.983,49.757) 28.983,50.65 ; P6.47@50.8,80.713 cw(c50.8,79.209) 51.864,80.272 cw(c52.927,81.336) P6.47@51.423,81.336 ; P6.47@50.8,80.967 cw(c50.8,80.076) 51.43,80.706 cw(c52.06,81.336) P6.47@51.169,81.336
FSMC_D6: P6.48 U4.11 | length 74.5
  Top Layer w0.254: v1@27.809,51.658 ccw(c27.896,52.282) 28.342,51.837 ; v1(27.813,51.689) 28.194,51.689 28.702,52.197 ; v1@27.844,51.91 ccw(c27.985,52.914) 28.702,52.197 ; 29.574,57.768 29.608,57.768 ; U4.11@31.083,57.768 29.608,57.768 ; 28.702,52.197 28.702,56.862 29.608,57.768
  Bottom Layer w0.254: v1(27.813,51.689) 32.131,51.689 40.894,42.926 46.228,42.926 50.8,47.498 P6.48@50.8,78.796 ; v1@27.971,51.531 cw(c28.351,51.151) 28.351,51.689 cw(c28.351,52.227) v1@27.971,51.847 ; P6.48@50.359,78.355 cw(c49.296,77.292) 50.8,77.292 cw(c52.304,77.292) P6.48@51.241,78.355 ; P6.48@50.539,78.535 cw(c49.909,77.905) 50.8,77.905 cw(c51.691,77.905) P6.48@51.061,78.535
FSMC_D7: P6.49 U4.10 | length 76.4
  Top Layer w0.254: 27.305,53.497 ccw(c28.097,53.497) v1@27.537,52.937 ; 27.305,54.111 ccw(c28.711,54.111) v1@27.717,53.117 ; v1(27.559,52.959) 27.305,53.213 27.305,56.769 28.804,58.268 U4.10@31.083,58.268
  Bottom Layer w0.254: v1(27.559,52.959) 32.258,52.959 41.529,43.688 45.72,43.688 49.558,47.526 49.558,80.038 P6.49@48.26,81.336 ; v1@27.717,52.801 cw(c28.097,52.421) 28.097,52.959 cw(c28.097,53.497) v1@27.717,53.117 ; P6.49@48.26,80.713 cw(c48.26,79.209) 49.324,80.272 cw(c50.387,81.336) P6.49@48.883,81.336 ; P6.49@48.26,80.967 cw(c48.26,80.076) 48.89,80.706 cw(c49.52,81.336) P6.49@48.629,81.336
FSMC_D8: P6.50 U4.31 | length 43.9
  Top Layer w0.254: U4.31@39.283,60.268 45.65,60.268 48.133,57.785 v1(48.133,53.975) ; v1@47.975,54.133 ccw(c47.595,54.513) 48.133,54.513 ccw(c48.671,54.513) v1@48.291,54.133
  Bottom Layer w0.254: P6.50@47.819,78.355 cw(c46.756,77.292) 48.26,77.292 cw(c49.764,77.292) P6.50@48.701,78.355 ; v1@47.975,54.133 ccw(c47.288,54.82) 48.26,54.82 ; P6.50@47.999,78.535 cw(c47.369,77.905) 48.26,77.905 cw(c49.151,77.905) P6.50@48.521,78.535 ; v1(48.133,53.975) 48.26,54.102 P6.50@48.26,78.796
FSMC_D9: P6.51 U4.29 | length 46
  Top Layer w0.254: U4.29@39.283,59.268 45.38,59.268 46.736,57.912 v1(46.736,54.102) ; v1@46.578,54.26 ccw(c46.198,54.64) 46.736,54.64 ccw(c47.274,54.64) v1@46.894,54.26
  Bottom Layer w0.254: P6.51@45.72,80.713 cw(c45.72,79.209) 46.784,80.272 cw(c47.847,81.336) P6.51@46.343,81.336 ; P6.51@45.72,80.967 cw(c45.72,80.076) 46.35,80.706 cw(c46.98,81.336) P6.51@46.089,81.336 ; P6.51@45.72,81.336 46.99,80.066 46.99,54.356 v1(46.736,54.102) ; v1@46.578,54.26 ccw(c45.584,55.254) 46.99,55.254 ; v1@46.758,54.08 ccw(c46.198,54.64) 46.99,54.64
FSMC_D10: P6.52 U4.28 | length 39.7
  Top Layer w0.254: U4.28@39.283,58.768 44.737,58.768 45.72,57.785 v1(45.72,54.61) ; v1@45.562,54.768 ccw(c45.182,55.148) 45.72,55.148 ccw(c46.258,55.148) v1@45.878,54.768
  Bottom Layer w0.254: P6.52@45.279,78.355 cw(c44.216,77.292) 45.72,77.292 cw(c47.224,77.292) P6.52@46.161,78.355 ; P6.52@45.459,78.535 cw(c44.829,77.905) 45.72,77.905 cw(c46.611,77.905) P6.52@45.981,78.535 ; v1@45.562,54.768 ccw(c45.182,55.148) 45.72,55.148 ccw(c46.258,55.148) v1@45.878,54.768 ; v1(45.72,54.61) P6.52@45.72,78.796
FSMC_D11: P6.53 U4.27 | length 38.6
  Top Layer w0.254: U4.27@39.3,58.251 U4.27@39.283,58.268 43.84,58.268 44.831,57.277 v1(44.831,55.626) ; v1@44.673,55.784 ccw(c44.293,56.164) 44.831,56.164 ccw(c45.369,56.164) v1@44.989,55.784
  Bottom Layer w0.254: P6.53@43.18,80.713 cw(c43.18,79.209) 44.244,80.272 cw(c45.307,81.336) P6.53@43.803,81.336 ; P6.53@43.18,80.967 cw(c43.18,80.076) 43.81,80.706 cw(c44.44,81.336) P6.53@43.549,81.336 ; P6.53@43.18,81.336 44.45,80.066 44.45,56.007 v1(44.831,55.626)
FSMC_D12: P6.54 U4.26 | length 33.8
  Top Layer w0.254: U4.26@39.283,57.768 42.308,57.768 v1(43.434,56.642) ; v1@43.211,56.642 ccw(c42.673,56.642) 43.053,57.023 ccw(c43.434,57.403) v1@43.434,56.865
  Bottom Layer w0.254: P6.54@42.739,78.355 cw(c40.756,76.372) 43.561,76.372 ; P6.54@42.919,78.535 cw(c41.369,76.985) 43.561,76.985 ; P6.54@43.099,78.715 cw(c41.983,77.599) 43.561,77.599 ; P6.54@43.18,78.796 43.561,78.415 43.561,56.769 v1(43.434,56.642) ; v1@43.276,56.8 ccw(c42.589,57.487) 43.561,57.487
FSMC_D13: P7.56 U4.25 | length 47.7
  Top Layer w0.254: U4.25@39.283,57.268 41.284,57.268 45.593,52.959 45.593,27.559 41.91,23.876 41.91,19.939 ; P7.56@40.64,18.796 40.767,18.796 41.91,19.939 ; P7.56@40.642,19.165 ccw(c40.649,20.34) 41.48,19.509 ; P7.56@40.644,19.419 ccw(c40.655,21.194) 41.91,19.939 ; P7.56@41.263,18.796 cw(c42.46,18.796) 41.614,19.643
FSMC_D14: P7.55 U4.24 | length 44.8
  Top Layer w0.254: U4.24@37.933,55.918 41.889,55.918 44.704,53.103 44.704,27.94 40.767,24.003 40.767,21.463 P7.55@40.64,21.336 ; P7.55@40.199,21.777 ccw(c38.829,23.147) 40.767,23.147 ; P7.55@40.379,21.597 ccw(c39.443,22.533) 40.767,22.533 ccw(c41.837,22.533) P7.55@41.081,21.777
FSMC_D15: P7.54 U4.22 | length 49.8
  Top Layer w0.254: U4.22@36.933,55.918 36.933,53.999 40.767,50.165 40.767,28.194 v1(39.243,26.67) ; v1@39.243,26.893 ccw(c39.243,27.431) 39.624,27.051 ccw(c40.004,26.67) v1@39.466,26.67
  Bottom Layer w0.254: v1(39.243,26.67) 43.18,26.67 44.45,25.4 44.45,20.066 P7.54@43.18,18.796 ; v1@39.401,26.512 cw(c39.781,26.132) 39.781,26.67 cw(c39.781,27.208) v1@39.401,26.828 ; P7.54@43.18,19.165 ccw(c43.18,20.056) 43.81,19.426 ccw(c44.44,18.796) P7.54@43.549,18.796 ; P7.54@43.18,19.419 ccw(c43.18,20.923) 44.244,19.86 ccw(c45.307,18.796) P7.54@43.803,18.796
FSMC_INT3: P7.43
FSMC_INTR: P6.19 RH8.2 | length 58.7
  Bottom Layer w0.254: P6.19@85.919,81.777 ccw(c84.856,82.84) 86.36,82.84 ccw(c87.864,82.84) P6.19@86.801,81.777 ; P6.19@86.099,81.597 ccw(c85.469,82.227) 86.36,82.227 ccw(c87.251,82.227) P6.19@86.621,81.597 ; P6.19@86.36,81.336 86.36,84.201 87.122,84.963 109.982,84.963 112.649,82.296 112.649,72.009 114.427,70.231 120.267,70.231 RH8.2@122.428,68.07 ; 121.344,69.154 cw(c120.26,68.07) RH8.2@121.793,68.07 ; 121.651,68.848 ccw(c122.301,69.498) RH8.2@122.301,68.578 ; 121.778,68.721 cw(c121.127,68.07) RH8.2@122.047,68.07
FSMC_NBL0: P7.6
FSMC_NBL1: P7.5
FSMC_NE2: P7.20 R34.1 U4.37 | length 97.2
  Top Layer w0.254: U4.37@37.933,64.118 39.474,65.659 v1(39.624,65.659) 40.513,66.548 57.531,66.548 82.55,41.529 82.55,17.018 83.439,16.129 84.836,16.129 86.36,17.653 ; U4.37@37.933,64.283 ccw(c37.933,64.681) 38.215,64.4 ; U4.37@37.933,64.537 ccw(c37.933,65.549) 38.648,64.833 ; U4.37@37.933,64.791 ccw(c37.933,66.416) 39.082,65.267 ; 38.987,65.172 cw(c39.624,64.535) v1@39.624,65.436 ; v1@39.624,65.882 ccw(c39.624,66.42) 40.005,66.04 ccw(c40.385,65.659) v1@39.847,65.659 ; P7.20@86.022,18.272 cw(c85.623,17.653) 86.36,17.653 ; P7.20@86.36,18.796 86.36,17.653 ; P7.20@86.698,18.272 ccw(c87.097,17.653) 86.36,17.653
  Bottom Layer w0.254: R34.1@38.608,67.056 ccw(c40.141,67.056) 39.057,65.972 ; 38.623,66.406 cw(c39.274,67.056) R34.1@38.354,67.056 38.354,66.675 39.37,65.659 v1(39.624,65.659) ; 38.81,66.219 ccw(c39.624,67.034) v1@39.624,65.882 ; 39.243,65.786 ccw(c39.624,66.166) v1@39.624,65.628
FSMC_NE3: P7.19
FSMC_NE4: P7.17
FSMC_NIORD: P6.15 RH20.2 | length 38.5
  Top Layer w0.254: P6.15@90.999,81.777 ccw(c89.936,82.84) 91.44,82.84 ccw(c92.944,82.84) P6.15@91.881,81.777 ; P6.15@91.179,81.597 ccw(c90.549,82.227) 91.44,82.227 ccw(c92.331,82.227) P6.15@91.701,81.597 ; P6.15@91.44,81.336 91.44,83.058 95.885,87.503 111.125,87.503 116.078,82.55 v1(116.078,82.421) ; 115.606,83.022 cw(c115.006,82.421) v1@115.855,82.421
  Bottom Layer w0.254: RH20.2@115.738,81.655 ccw(c115.046,82.421) v1(116.078,82.421) ; v1@115.92,82.264 cw(c115.54,81.883) 116.078,81.883 cw(c116.616,81.883) v1@116.236,82.264 ; RH20.2@116.078,81.278 v1(116.078,82.421) ; RH20.2@116.418,81.655 cw(c117.11,82.421) v1(116.078,82.421)
FSMC_NIOS16: P6.39 RH11.2 | length 81.2
  Bottom Layer w0.254: P6.39@60.519,81.777 ccw(c59.456,82.84) 60.96,82.84 ccw(c62.464,82.84) P6.39@61.401,81.777 ; P6.39@60.699,81.597 ccw(c60.069,82.227) 60.96,82.227 ccw(c61.851,82.227) P6.39@61.221,81.597 ; P6.39@60.96,81.336 60.96,83.058 63.5,85.598 110.109,85.598 113.208,82.499 113.208,74.625 114.3,73.533 120.267,73.533 RH11.2@122.428,71.372 ; 121.344,72.456 cw(c120.26,71.372) RH11.2@121.793,71.372 ; 121.651,72.15 ccw(c122.301,72.8) RH11.2@122.301,71.88 ; 121.778,72.023 cw(c121.127,71.372) RH11.2@122.047,71.372
FSMC_NIOWR: P6.17 RH2.2 | length 58.7
  Bottom Layer w0.254: P6.17@88.9,81.336 88.9,81.407 90.932,83.439 109.728,83.439 111.379,81.788 111.379,66.802 114.554,63.627 120.267,63.627 RH2.2@122.428,61.466 ; P6.17@88.9,81.705 ccw(c88.9,82.424) 89.409,81.916 ; P6.17@88.9,81.959 ccw(c88.9,83.292) 89.842,82.349 ; P6.17@89.269,81.336 cw(c90.331,81.336) 89.58,82.087 ; P6.17@89.523,81.336 cw(c91.198,81.336) 90.014,82.521 ; 121.344,62.55 cw(c120.26,61.466) RH2.2@121.793,61.466 ; 121.651,62.244 ccw(c122.301,62.894) RH2.2@122.301,61.974 ; 121.778,62.117 cw(c121.127,61.466) RH2.2@122.047,61.466
FSMC_NOE: P7.26 U4.35 | length 77.5
  Top Layer w0.254: U4.35@39.283,62.268 40.424,62.268 43.307,65.151 56.007,65.151 77.47,43.688 77.47,20.066 P7.26@78.74,18.796 ; P7.26@78.117,18.796 ccw(c76.613,18.796) 77.676,19.86 ccw(c78.74,20.923) P7.26@78.74,19.419 ; P7.26@78.371,18.796 ccw(c77.48,18.796) 78.11,19.426 ccw(c78.74,20.056) P7.26@78.74,19.165
FSMC_NREG: P6.16 RH23.2 | length 42.6
  Top Layer w0.254: P6.16@90.817,78.796 ccw(c89.313,78.796) 90.376,79.86 ccw(c91.44,80.923) P6.16@91.44,79.419 ; P6.16@91.071,78.796 ccw(c90.18,78.796) 90.81,79.426 ccw(c91.44,80.056) P6.16@91.44,79.165 ; P6.16@91.44,78.796 90.17,80.066 90.17,83.415 95.274,88.519 113.282,88.519 v1(116.078,85.723) ; v1@115.855,85.723 ccw(c115.317,85.723) 115.697,86.104 ccw(c116.078,86.485) v1@116.078,85.946
  Bottom Layer w0.254: RH23.2@115.738,84.957 ccw(c115.046,85.723) v1(116.078,85.723) ; v1@115.92,85.566 cw(c115.54,85.185) 116.078,85.185 cw(c116.616,85.185) v1@116.236,85.566 ; RH23.2@116.078,84.58 v1(116.078,85.723) ; RH23.2@116.418,84.957 cw(c117.11,85.723) v1(116.078,85.723)
FSMC_NWAIT: P7.22
FSMC_NWE: P7.25 U4.36 | length 76.5
  Top Layer w0.254: U4.36@39.283,62.768 39.781,62.768 42.926,65.913 56.642,65.913 78.74,43.815 P7.25@78.74,21.336 ; U4.36@39.956,62.768 cw(c40.379,62.768) 40.08,63.067 ; P7.25@78.299,21.777 ccw(c77.236,22.84) 78.74,22.84 ccw(c80.244,22.84) P7.25@79.181,21.777 ; P7.25@78.479,21.597 ccw(c77.849,22.227) 78.74,22.227 ccw(c79.631,22.227) P7.25@79.001,21.597